# Altium PCB Group31_Racer_pli49.PcbDoc
Units mm, origin at the board's own origin, x right, y up, seen from the top; angles counter-clockwise.
Board outline 64 x 85 mm, 4 copper layers (Top Side, Ground Plane, Power Plane, Bottom Side), stack 0.844 mm thick; 87 components, 64 nets, 291 pads, 87 vias.
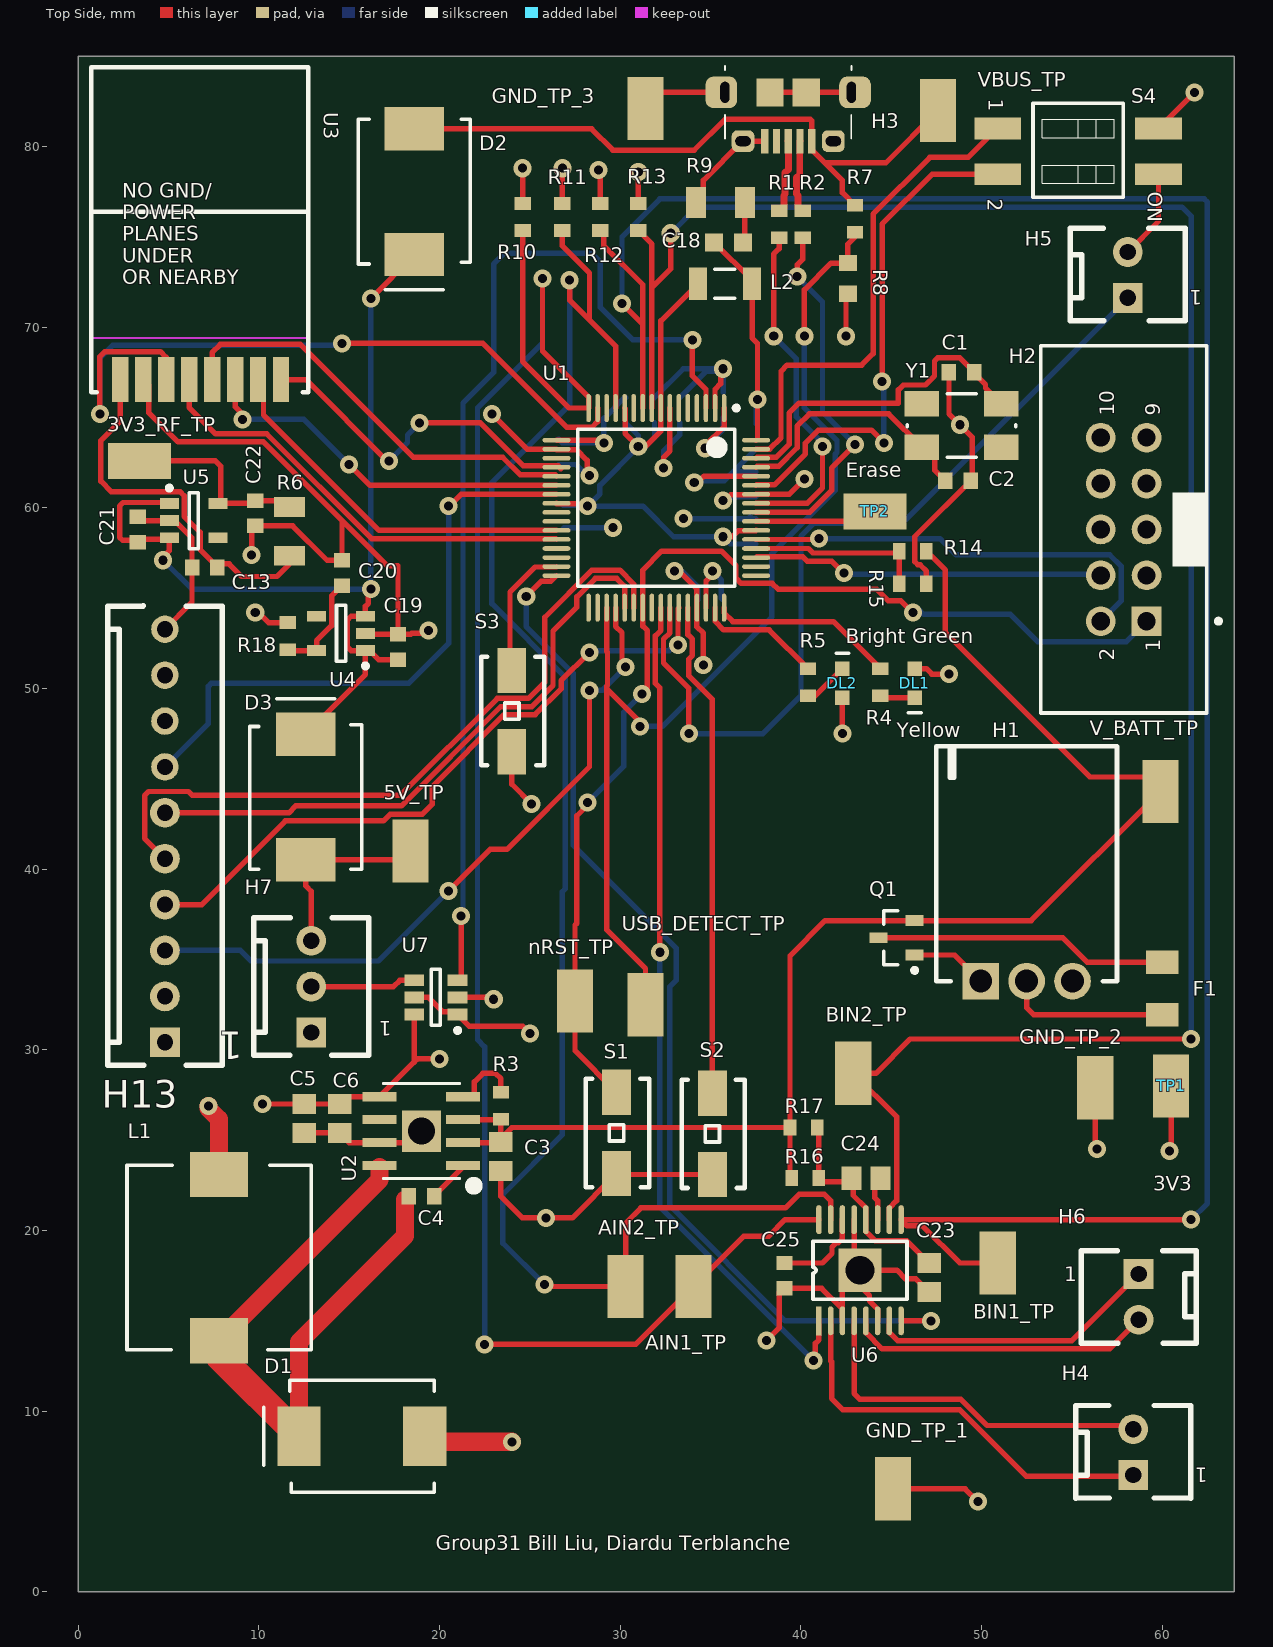
[diagram p0: Top Side view]
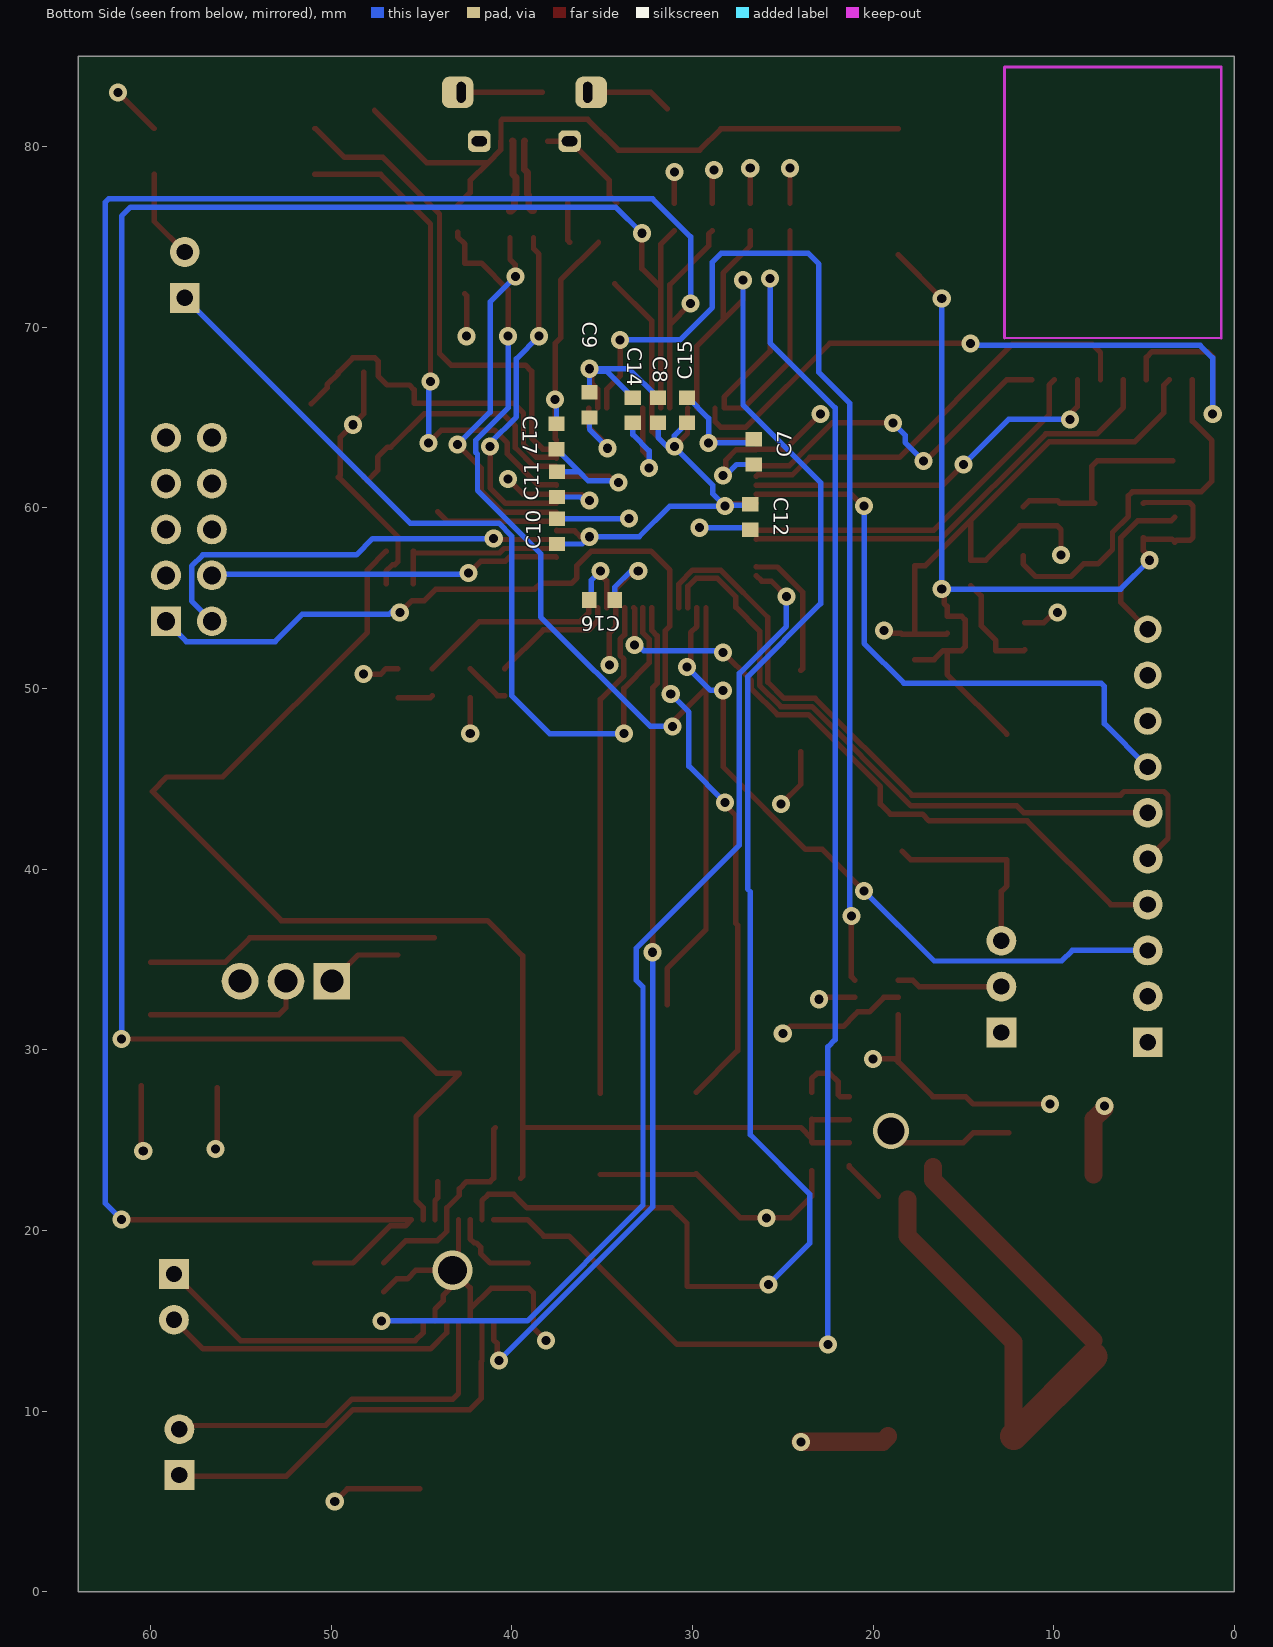
[diagram p1: Bottom Side view, seen from below]
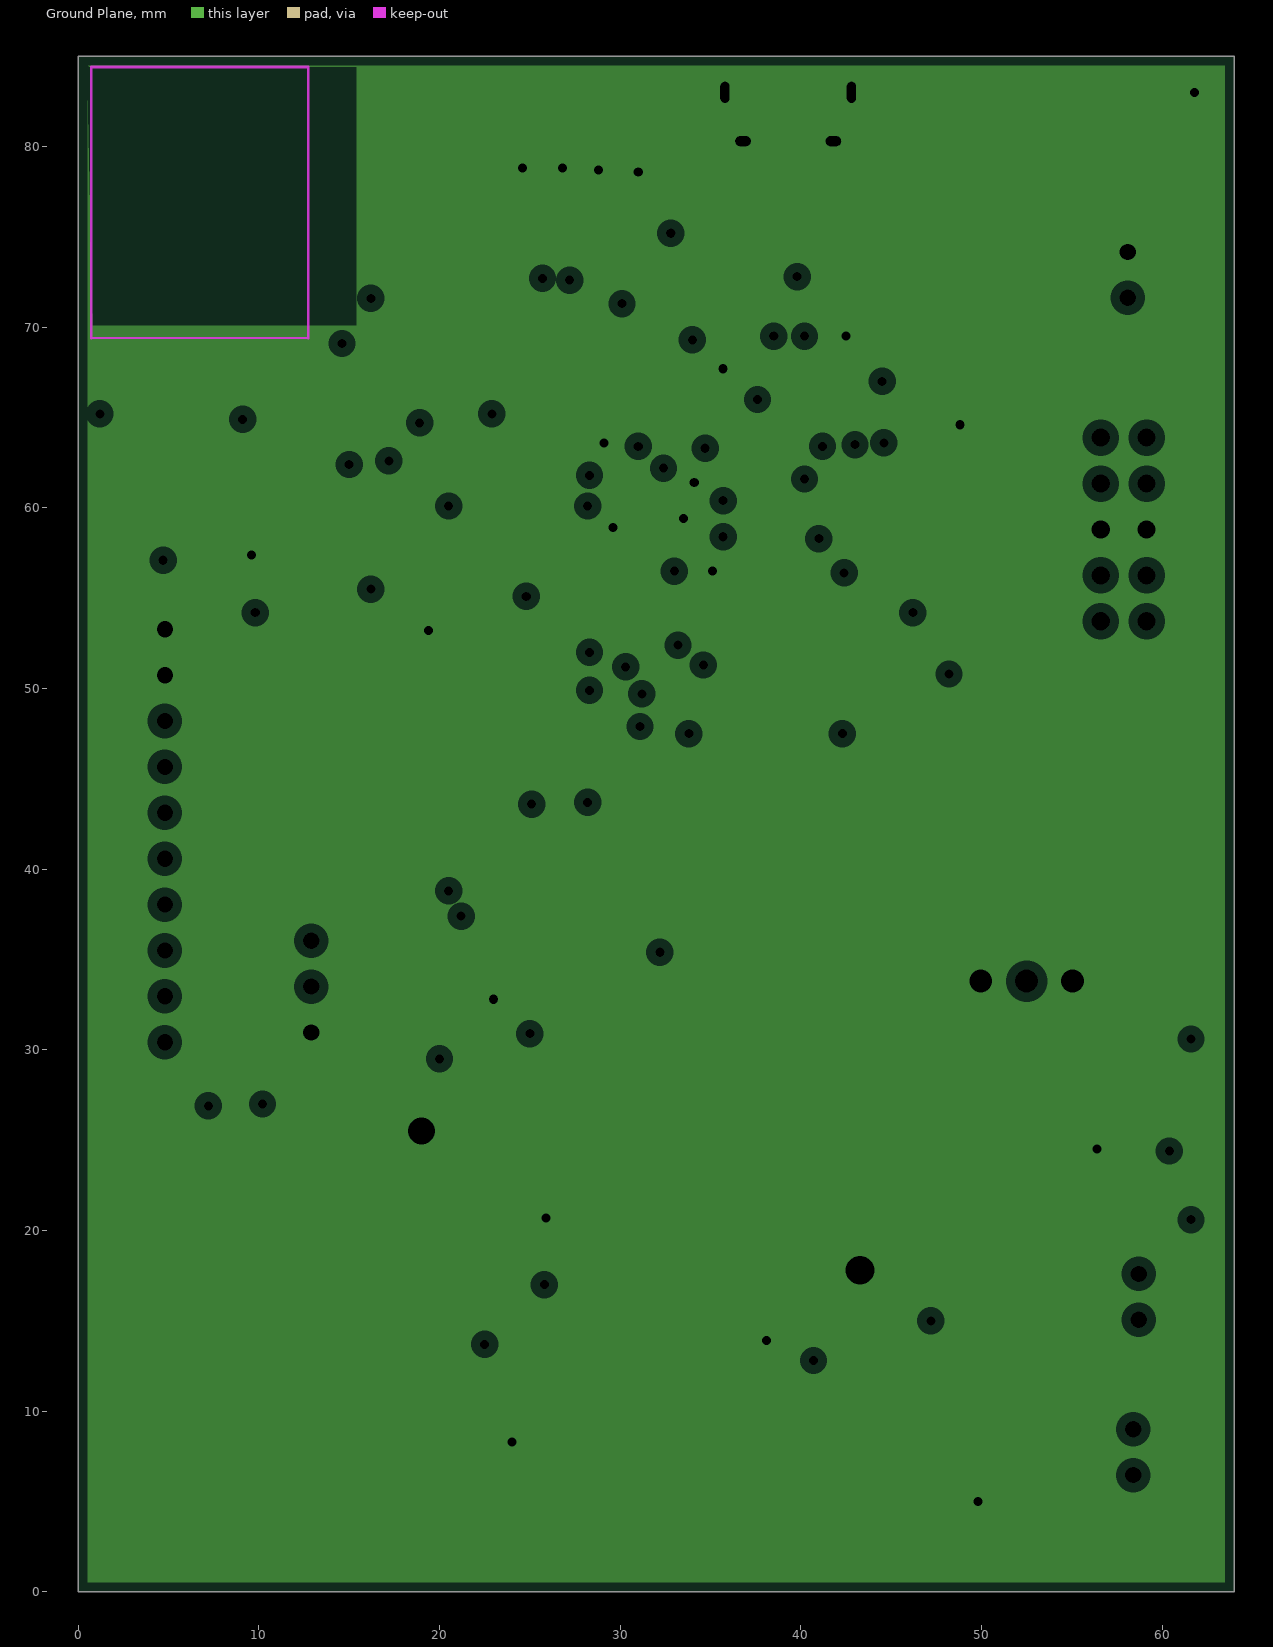
[diagram p2: Ground Plane, clearances drawn from the general rule]
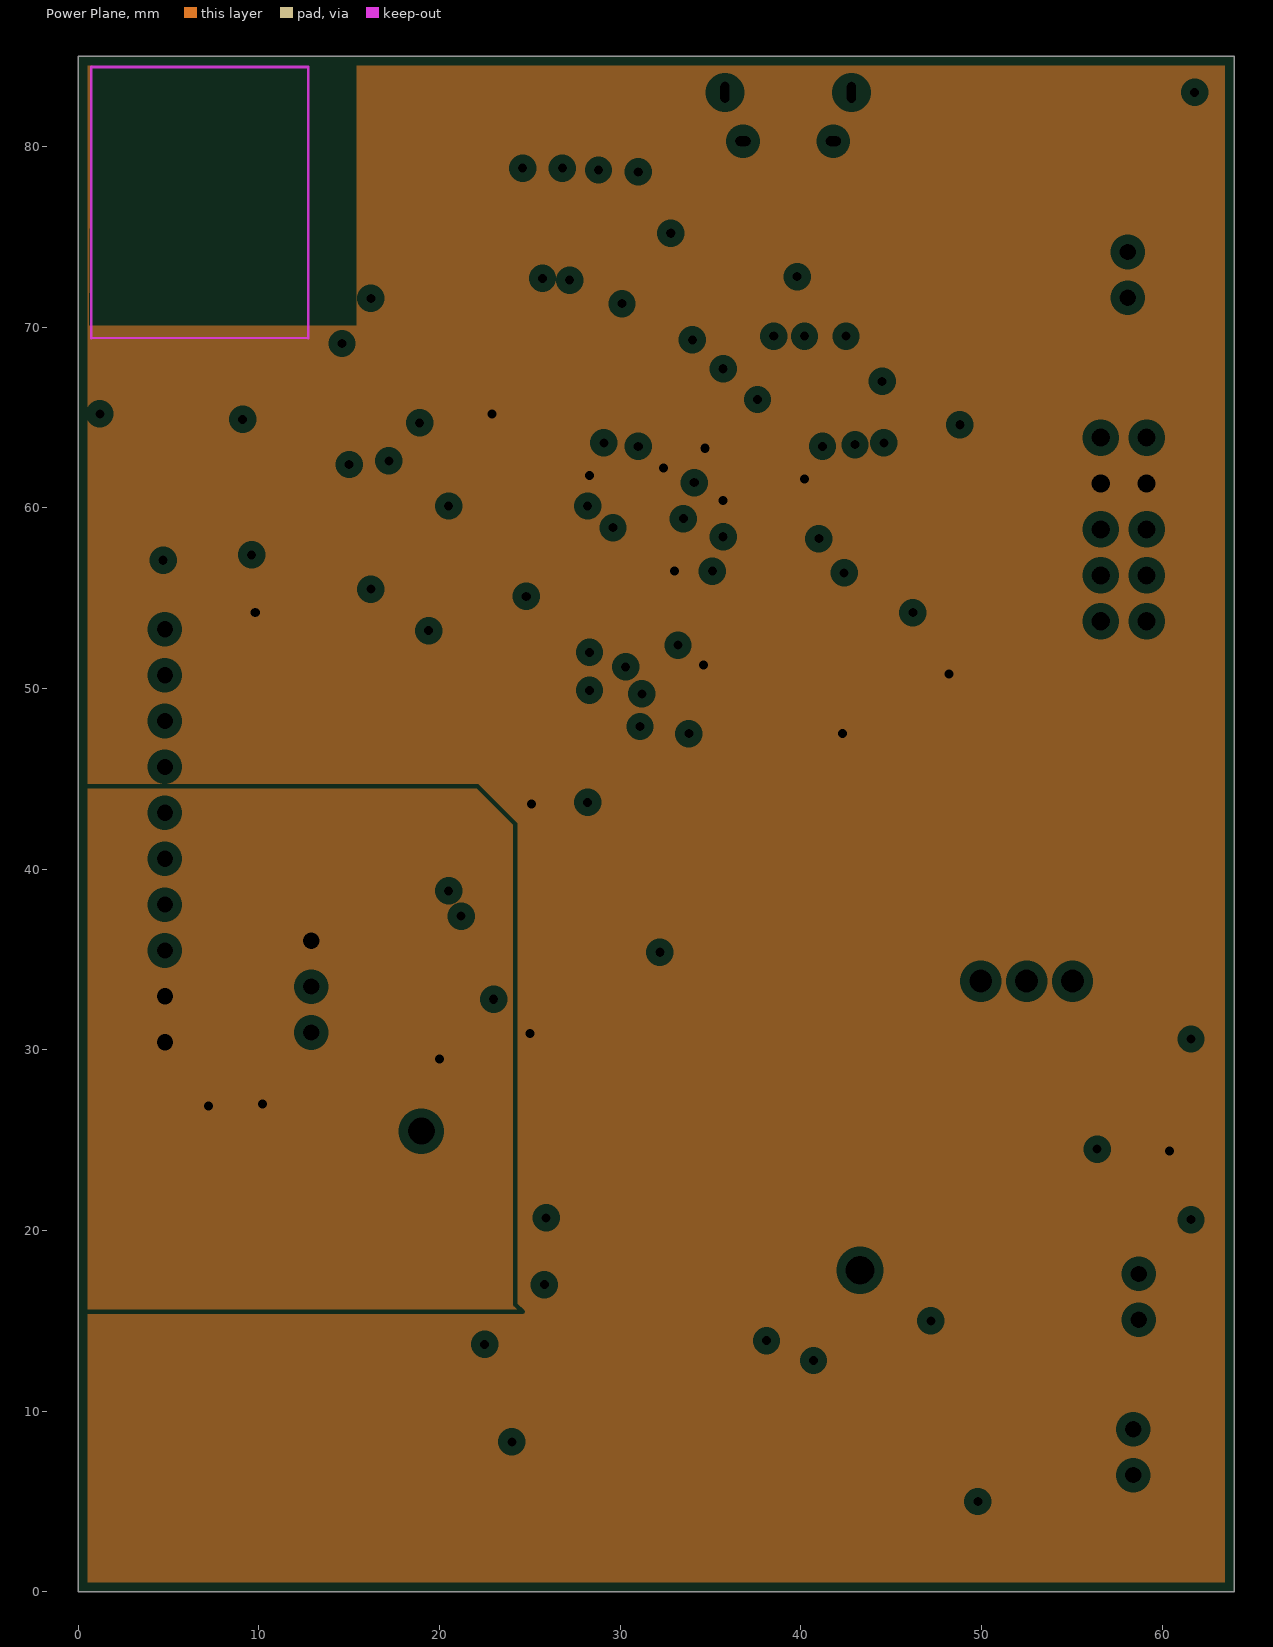
[diagram p3: Power Plane, clearances drawn from the general rule]

## Layer stack, top to bottom
Top Solder: solder mask 0.0102, Solder Resist, Dk 3.5
Top Side: signal copper 0.0356
Dielectric 1: core 0.32, FR-4, Dk 4.8
Ground Plane: plane copper 0.036, net GND
Dielectric 3: prepreg 0.127, Dk 4.2
Power Plane: plane copper 0.036, net (Multiple Nets)
Dielectric 4: core 0.254, Dk 4.2
Bottom Side: signal copper 0.0356
Bottom Solder: solder mask 0.0102, Solder Resist, Dk 3.5

## Board outline
0,85 64,85 64,0 0,0 0,85

## Design rules (kind name [scope] priority, off if disabled: settings)
BoardOutlineClearance [All] p1: gap=0.5 ignorepadtopadclearanceinfootprint=FALSE
Clearance Min_Clearance_Circuit_Labs [All] p1: gap=0.15 ignorepadtopadclearanceinfootprint=FALSE except(0: Arc-Hole Track-Hole SMDPad-Hole THPad-Hole Via-Hole Fill-Hole Poly-Hole Region-Hole Text-Hole)
DiffPairsRouting [All] p1: maxlimit=0.254 minlimit=0.254 mostfreqgap=0.254 toplayer_minwidth=0.381 toplayer_maxwidth=0.381 toplayer_prefwidth=0.381 bottomlayer_minwidth=0.381 bottomlayer_maxwidth=0.381 bottomlayer_prefwidth=0.381 maxuncoupledlength=12.7
FanoutControl Fanout_BGA [IsBGA] p1 off: bgadir=Out bgaviamode=Centered fanoutstyle=Auto fanoutdirection=Alternating viagrid=0.025 // Fanout_BGA (Default Rule)
HoleSize [All] p1: absolutevalues=TRUE maxlimit=10 minlimit=0.3 maxpercent=80.000 minpercent=20.000
MinimumAnnularRing [All] p1: minimumring=0.1
MinimumSolderMaskSliver [All] p1: minsoldermaskwidth=0.1
NetAntennae [All] p1: netantennaetolerance=1
PasteMaskExpansion [All] p1 off: expansion=0.2
PlaneClearance [All] p1: clearance=0.508
PlaneConnect [All] p1: planeconnectstyle=Relief reliefexpansion=0.508 reliefentries=4 reliefconductorwidth=0.254 reliefairgap=0.254
PolygonConnect [All] p1: connectstyle=Relief reliefconductorwidth=0.254 reliefentries=4 polygonreliefangle="90 Angle" airgapwidth=0.254
RoutingVias [All] p1: holewidth=0.5 width=1 viastyle="Through Hole" minholewidth=0.3 minwidth=0.6 maxholewidth=1 maxwidth=2
SMDNeckDown [All] p1 off: percent=50.000
SMDToCorner [All] p1: distance=98425
SMDToPlane [All] p1: distance=1968504
SilkToSolderMaskClearance SilkscreenOverComponentPads [IsPad] p1: minsilkscreentomaskgap=0.254 clearancetoexposedcopper=TRUE
SolderMaskExpansion [All] p1: expansion=0.102
ViasUnderSMD [All] p1: allowed=FALSE
Width [All] p1: maxlimit=2 minlimit=0.15 preferedwidth=0.3
21 further rules are at their usual default settings.

## Classes and differential pairs
differential pair D: +D_P -D_N

## Components (designator, comment, footprint, x,y, rotation, side; value= is the part's Value field where it differs from the comment)
3V3_RF_TP "TP" TP_1206 3.4,62.6 r180 top
5V_TP "TP" TP_1206 18.4,41 r90 top
AIN1_TP "TP" TP_1206 34.054,16.9 r270 top
AIN2_TP "TP" TP_1206 30.3,16.9 r90 top
BIN1_TP "TP" TP_1206 50.9,18.2 r90 top
BIN2_TP "TP" TP_1206 42.9,28.7 r90 top
C1 "27pF" CAPC1608L 48.9,67.5 r0 top
C2 "27pF" CAPC1608L 48.7,61.5 r180 top
C3 "10uF" CAPC2012L 23.4,24.1 r90 top
C4 "100nF" CAPC1608L 19,21.9 r180 top
C5 "33uF" CAPC2012L 12.5,26.2 r90 top
C6 "33uF" CAPC2012L 14.467,26.2 r90 top
C7 "100nF" CAPC1608L 26.6,63.1 r270 bottom
C8 "100nF" CAPC1608L 31.9,65.4 r90 bottom
C9 "100nF" CAPC1608L 35.7,65.7 r270 bottom
C10 "100nF" CAPC1608L 37.5,58.7 r90 bottom
C11 "100nF" CAPC1608L 37.5,61.3 r270 bottom
C12 "100nF" CAPC1608L 26.8,59.5 r270 bottom
C13 "10uF" CAPC1608L 7,56.7 r0 top
C14 "100nF" CAPC1608L 33.3,65.4 r270 bottom
C15 "100nF" CAPC1608L 30.3,65.4 r90 bottom
C16 "100nF" CAPC1608L 35,54.9 r180 bottom
C17 "100nF" CAPC1608L 37.525,63.95 r90 bottom
C18 "4.7uF" CAPC1608N 36,74.7 r180 top
C19 "1uF" CAPC1608L 17.7,52.3 r270 top
C20 "1uF" CAPC1608L 14.6,56.4 r270 top
C21 "1uF" CAPC1608L 3.292,58.796 r270 top
C22 "1uF" CAPC1608L 9.8,59.7 r90 top
C23 "10uF" CAPC2012L 47.1,17.4 r270 top
C24 "10uF" CAPC2012L 43.6,22.9 r0 top
C25 "2.2uF" CAPC1608L 39.1,17.5 r270 top
D1 "VS-30BQ015-M3/9AT" SMC 15.7,8.6 r180 top
D2 "VS-30BQ015-M3/9AT" SMC 18.6,77.5 r270 top
D3 "VS-30BQ015-M3/9AT" SMC 12.6,44 r90 top
DL1 "Yellow" WL-SMCW0603 46.3,49.5 r90 top
DL2 "Bright Green" WL-SMCW0603 42.3,51.1 r270 top
F1 "5A" RESC3216N 60,33.4 r90 top
GND_TP_1 "TP" TP_1206 45.1,5.7 r90 top
GND_TP_2 "TP" TP_1206 56.3,27.9 r90 top
GND_TP_3 "TP" TP_1206 31.4,82.1 r90 top
H1 "Battery_HEADER_3pin" BATT_HEADER_3POS 52.5,33.8 r0 top
H2 "Header 5X2 Vert" IDC2.54-V10D 57.87,58.804 r90 top
H3 "JS_USB_MICRO_B" FCI_USB_10118194-0001LF 39.3,84.45 r180 top
H4 "2 Pin Molex KK HDR" MOLEX_KK_2_HDR 58.4,6.46 r90 top
H5 "2 Pin Molex KK HDR" MOLEX_KK_2_HDR 58.1,71.624 r90 top
H6 "2 Pin Molex KK HDR" MOLEX_KK_2_HDR 58.7,17.597 r270 top
H7 "3 Pin Molex KK Hdr" MOLEX_KK_3_HDR 12.9,30.96 r90 top
H13 "=Value" MOLEX_KK_10_HDR 4.8,30.42 r90 top
L1 "IND 5.2UH 6A" INDUCTOR5u2 7.8,18.5 r90 top
L2 "1A max, Idc 0.3R," INDC3216L 35.8,72.4 r180 top
nRST_TP "TP" TP_1206 27.5,32.7 r90 top
Q1 "SSM3J328R,LF" SOT23_L 45.3,36.2 r180 top
R1 "27R" RESC1608L 38.8,75.7 r270 top
R2 "27R" RESC1608L 40.1,75.7 r270 top
R3 "100K" RESC1608L 23.4,26.9 r270 top
R4 "3K3" RESC1608L 44.4,50.35 r90 top
R5 "3K3" RESC1608L 40.4,50.35 r90 top
R6 "1R" RESC3216L 11.7,58.7 r270 top
R7 "27K" RESC1608L 43,76 r90 top
R8 "47K" RESC1608N 42.6,72.7 r90 top
R9 "1R" RESC3216L 35.55,76.9 r0 top
R10 "10K" RESC1608L 24.6,76.1 r270 top
R11 "10K" RESC1608L 26.8,76.1 r270 top
R12 "10K" RESC1608L 28.9,76.1 r270 top
R13 "10K" RESC1608L 31,76.1 r270 top
R14 "10K" RESC1608L 46.2,57.6 r0 top
R15 "5K6" RESC1608L 46.2,55.8 r180 top
R16 "0R" RESC1608L 40.25,22.9 r180 top
R17 "0R" RESC1608L 40.15,25.7 r180 top
R18 "0R" RESC1608L 11.6,52.9 r90 top
S1 "EVQPNF05M" EVQPNF05M 29.8,25.4 r270 top
S2 "EVQPNF05M" EVQPNF05M 35.1,25.35 r270 top
S3 "EVQPNF05M" EVQPNF05M 24,48.75 r270 top
S4 "WS_SW DIP-2" DIP_SW_2WAY_SMD 50.9,81 r270 top
TP1 "3V3" TP_1206 60.5,28 r270 top value=TP
TP2 "Erase" TP_1206 44.1,59.8 r180 top value=TP
U1 "ATSAM4S8BA-ANR" LQFP64_L 32,60 r270 top locked
U2 "ADP2302ARDZ-5.0 BUCK" RD_8_1 19,25.5 r180 top locked value=Value
U3 "nRF24 SMD" NRF24 0.729,66.4 r0 top
U4 "CAT6219-330TDGT3" SOT95P280X145-5N 14.55,53.05 r180 top
U5 "CAT6219-330TDGT3" SOT95P280X145-5N 6.392,59.296 r0 top
U6 "DRV8833" HTSOP16 41,15 r90 top locked
U7 "SN74LVC1T45" SOT23-6_N 19.8,32.9 r180 top
USB_DETECT_TP "TP" TP_1206 31.4,32.5 r90 top
V_BATT_TP "TP" TP_1206 59.9,44.3 r90 top
VBUS_TP "TP" TP_1206 47.6,82 r90 top
Y1 "12MHz" 6.0X3.5-4 48.9,64.556 r180 top

## Footprints (in the part's own frame and the unit in brackets; to place one, negate y for a bottom-side part, rotate by r counter-clockwise, add the part's x,y. Pads: shape width x height; smd on the part's side, far side on the other; paste and mask are expansions set on the pad)
6.0X3.5-4 [mm] "4 SMD 6.0X3.5 mm No Lead Crystal"
  rect 1.9x1.4 smd: 1(-2.2,-1.2) 2(2.2,-1.2) 3(2.2,1.2) 4(-2.2,1.2)
  silkscreen extent -3,-1.75 3,1.75, body extent -3,-1.75 3,1.75, height 1.2
BATT_HEADER_3POS [mil]
  rect 80x80 hole 50: 1(-100,0)
  round 80 hole 50: 2(0,0) 3(100,0)
  silkscreen extent -197,0 197,512
CAPC1608L [mm] "Chip Capacitor, Body 1.6x0.8mm, IPC High Density"
  rect 0.8x0.9 smd: 1(-0.7,0) 2(0.7,0)
  body extent -0.87,-0.48 0.87,0.48, height 0.85
CAPC1608N [mm] "Chip Capacitor, Body 1.6x0.8mm, IPC Medium Density"
  rect 1x1 smd: 1(-0.8,0) 2(0.8,0)
  body extent -0.87,-0.48 0.87,0.48, height 0.85
CAPC2012L [mm] "Chip Capacitor, Body 2.0x1.3mm, IPC High Density"
  rect 1.1x1.3 smd: 1(-0.8,0) 2(0.8,0)
  body extent -1.1,-0.72 1.1,0.72, height 1.1
DIP_SW_2WAY_SMD [mm] "DIP Switch; 4 Leads"
  rect 1.2x2.6 smd: 1(0,0) 2(2.54,0) 3(2.54,8.9) 4(0,8.9)
  silkscreen extent -1.4,1.95 3.81,6.95
EVQPNF05M [mm] "Panansonic light touch SMD push button switch"
  rect 2.5x1.6 smd: 1(-2.25,0) 2(2.25,0)
  silkscreen extent -3,-1.7 3,1.8, body extent -3,-1.7 3,1.8, height 5
FCI_USB_10118194-0001LF [mm] "Micro USB B Type Receptacle"
  rect 0.4x1.35 smd mask+0.07: 1(-1.3,4.15) 2(-0.65,4.15) 3(0,4.15) 4(0.65,4.15) 5(1.3,4.15)
  rrect50% 1.75x1.75 hole 0.5 slot 1.15 at 90 deg copper offset -0.2,0 paste+0 mask+0.1: 6(-3.5,1.45)
  rrect50% 1.25x1.2 hole 0.55 slot 0.85 at 0 deg: 6(-2.5,4.15) 6(2.5,4.15)
  rect 1.5x1.55 smd: 6(-1,1.45) 6(1,1.45)
  rrect50% 1.75x1.75 hole 0.5 slot 1.15 at 90 deg copper offset 0.2,0 paste+0 mask+0.1: 6(3.5,1.45)
  silkscreen extent -3.5,0 3.5,4
HTSOP16 [mm]
  rect 1.6x0.3 smd: 1(0,0)
  oval 1.6x0.3 smd: 2(0,-0.65) 3(0,-1.3) 4(0,-1.95) 5(0,-2.6) 6(0,-3.25) 7(0,-3.9) 8(0,-4.55) 9(5.6,-4.55) 10(5.6,-3.9) 11(5.6,-3.25) 12(5.6,-2.6) 13(5.6,-1.95) 14(5.6,-1.3) 15(5.6,-0.65) 16(5.6,0)
  rect 2.4x2.4 smd paste-0.5: 17(2.8,-2.275)
  silkscreen extent 1.2,-4.88 4.4,0.33
IDC2.54-V10D [mm] "Connector; IDC, Low Profile Male Header, Thru-Hole; 10 Position; Vertical; Pitch 2.54 mm; Body 20.32 x 9.2 x 9.45 mm (LxWxH)"
  rect 1.65x1.65 hole 1: 1(-5.08,-1.27)
  round 1.65 hole 1: 2(-5.08,1.27) 3(-2.54,-1.27) 4(-2.54,1.27) 5(0,-1.27) 6(0,1.27) 7(2.54,-1.27) 8(2.54,1.27) 9(5.08,-1.27) 10(5.08,1.27)
  silkscreen extent -10.16,-5.38 10.16,4.6, body extent -10.16,-4.6 10.16,4.6, height 9.45
INDC3216L [mm] "Chip Inductor, Body 3.2x1.6mm, IPC High Density"
  rect 1x1.8 smd: 1(-1.5,0) 2(1.5,0)
  silkscreen extent -0.55,-0.8 0.55,0.8, body extent -1.75,-0.95 1.75,0.95, height 1.9
INDUCTOR5u2 [mm]
  rect 2.5x3.2 smd: 1(-4.6,0) 2(4.6,0)
  silkscreen extent -5.1,-5.1 5.1,5.1
LQFP64_L [mm] "Thin QFP, 64-Leads, Body 10x10mm, Pitch 0.5mm, IPC High Density"
  oval 1.55x0.25 smd mask+0.07: 1(-5.525,3.75) 2(-5.525,3.25) 3(-5.525,2.75) 4(-5.525,2.25) 5(-5.525,1.75) 6(-5.525,1.25) 7(-5.525,0.75) 8(-5.525,0.25) 9(-5.525,-0.25) 10(-5.525,-0.75) 11(-5.525,-1.25) 12(-5.525,-1.75) 13(-5.525,-2.25) 14(-5.525,-2.75) 15(-5.525,-3.25) 16(-5.525,-3.75) 33(5.525,-3.75) 34(5.525,-3.25) 35(5.525,-2.75) 36(5.525,-2.25) 37(5.525,-1.75) 38(5.525,-1.25) 39(5.525,-0.75) 40(5.525,-0.25) 41(5.525,0.25) 42(5.525,0.75) 43(5.525,1.25) 44(5.525,1.75) 45(5.525,2.25) 46(5.525,2.75) 47(5.525,3.25) 48(5.525,3.75)
  oval 0.25x1.55 smd mask+0.07: 17(-3.75,-5.525) 18(-3.25,-5.525) 19(-2.75,-5.525) 20(-2.25,-5.525) 21(-1.75,-5.525) 22(-1.25,-5.525) 23(-0.75,-5.525) 24(-0.25,-5.525) 25(0.25,-5.525) 26(0.75,-5.525) 27(1.25,-5.525) 28(1.75,-5.525) 29(2.25,-5.525) 30(2.75,-5.525) 31(3.25,-5.525) 32(3.75,-5.525) 49(3.75,5.525) 50(3.25,5.525) 51(2.75,5.525) 52(2.25,5.525) 53(1.75,5.525) 54(1.25,5.525) 55(0.75,5.525) 56(0.25,5.525) 57(-0.25,5.525) 58(-0.75,5.525) 59(-1.25,5.525) 60(-1.75,5.525) 61(-2.25,5.525) 62(-2.75,5.525) 63(-3.25,5.525) 64(-3.75,5.525)
  silkscreen extent -5.65,-4.35 4.35,4.55, body extent -5,-5 5,5, height 1.6
MOLEX_KK_2_HDR [mil] "MOLEX_KK_2_HDR"
  rect 65x65 hole 35.43: 1(0,0)
  round 65 hole 35.43: 2(100,0)
  silkscreen extent -50,-125 152,125, body extent -44,-121 146,119, height 630
MOLEX_KK_3_HDR [mil] "MOLEX_KK_3_HDR"
  rect 65x65 hole 35.43: 1(0,0)
  round 65 hole 35.43: 2(100,0) 3(200,0)
  silkscreen extent -50,-125 250,125, body extent -44,-120 244,119, height 630
MOLEX_KK_10_HDR [mil] "MOLEX_KK_10_HDR"
  rect 65x65 hole 35.43: 1(0,0)
  round 65 hole 35.43: 2(100,0) 3(200,0) 4(300,0) 5(400,0) 6(500,0)
  round 60 hole 35.43: 7(600,0) 8(700,0) 9(800,0) 10(900,0)
  silkscreen extent -50,-125 951,125, body extent -44,-120 944,120, height 630
NRF24 [mm]
  rect 0.9x2.5 smd: 1(1.6,0.7) 2(2.871,0.7) 3(4.143,0.7) 4(5.414,0.7) 5(6.686,0.7) 6(7.957,0.7) 7(9.229,0.7) 8(10.5,0.7)
  Keep-Out Layer lines w0.1: 0,3 12,3
  Keep-Out Layer lines w0.15: 0,3 0,18 12,18 12,3
  silkscreen extent 0,0 12,18
RD_8_1 [mil]
  rect 74x20 smd paste+0 mask+0: 1(-91,75) 2(-91,25) 3(-91,-25) 4(-91,-75) 5(91,-75) 6(91,-25) 7(91,25) 8(91,75)
  rect 84.65x90 smd paste-44.5 mask+0: EPAD(0,0)
  silkscreen extent -118,-104 84,123, body extent 0,0 10,10, height 10
RESC1608L [mm] "Chip Resistor, Body 1.6x0.8mm, IPC High Density"
  rect 0.7x0.9 smd: 1(-0.75,0) 2(0.75,0)
  body extent -0.85,-0.48 0.85,0.48, height 0.9
RESC1608N [mm] "Chip Resistor, Body 1.6x0.8mm, IPC Medium Density"
  rect 0.9x1 smd: 1(-0.85,0) 2(0.85,0)
  body extent -0.85,-0.48 0.85,0.48, height 0.6
RESC3216L [mm] "Chip Resistor, Body 3.1x1.6mm, IPC High Density"
  rect 1.1x1.7 smd: 1(-1.35,0) 2(1.35,0)
  body extent -1.68,-0.87 1.68,0.87, height 2.54
RESC3216N [mm] "Chip Resistor, Body 3.2x1.6mm, IPC Medium Density"
  rect 1.3x1.8 smd: 1(-1.45,0) 2(1.45,0)
  body extent -1.68,-0.87 1.68,0.87, height 0.71
SMC [mm] "DO-214-AB/SMC; 2 C-Bend Leads; Body 7.9 x 5.9 mm, inc. leads (LxW)"
  rect 2.4x3.3 smd: 1(-3.475,0) 2(3.475,0)
  silkscreen extent -4,-3.1 5.43,3.1
SOT23-6_N [mm]
  rect 1.1x0.65 smd: 1(-1.2,0.95) 2(-1.2,0) 3(-1.2,-0.95) 4(1.2,-0.95) 5(1.2,0) 6(1.2,0.95)
  silkscreen extent -1.33,-1.55 0.25,1.95, body extent -0.9,-1.55 0.9,1.55, height 1.45
SOT23_L [mm] "SOT23, 3-Leads, Body 2.9x1.3mm, Pitch 0.95mm, Lead Span 2.3mm, IPC High Density"
  rect 1x0.6 smd: 1(-1,0.95) 2(-1,-0.95) 3(1,0)
  silkscreen extent -1.13,-1.5 0.7,1.92, body extent -0.7,-1.5 0.7,1.5, height 1.1
SOT95P280X145-5N [mm] "SOT23, 5-Leads, Body 2.90x2.80mm, Pitch 0.95mm, IPC Medium Density"
  rect 1.05x0.6 smd: 1(-1.35,0.95) 2(-1.35,0) 3(-1.35,-0.95) 4(1.35,-0.95) 5(1.35,0.95)
  silkscreen extent -1.48,-1.55 0.25,1.92, body extent -0.87,-1.52 0.87,1.53, height 1.45
TP_1206 [mm] "Test Point Pad"
  rect 3.5x2 smd: 1(0,0)
  body extent -1.62,-0.85 1.63,0.8, height 2
WL-SMCW0603 [mm] "2.4 x 0.8 x 0.7mm LED"
  rect 0.8x0.8 smd: 1(0,0) 2(1.6,0)
  silkscreen extent -0.85,-0.35 -0.85,0.35

## Part data
3V3_RF_TP 5V_TP AIN1_TP AIN2_TP BIN1_TP BIN2_TP GND_TP_1 GND_TP_2 GND_TP_3 nRST_TP TP1 TP2 USB_DETECT_TP V_BATT_TP VBUS_TP: library part TP_1206, "Test-Point 3.3x1.6x2.1mm SMD", Manufacturer="Harwin Inc", Manufacturer Part Number=S1751-46R, Supplier Part Number 1=952-1478-2-ND, Mounting Type="Surface Mount", Storage Location=ProtoPlace, Supplier="ECE Dept", Supplier 1=Digi-Key, Supplier 2=Farnell, Supplier Part Number 2=1826282, Type="PC Test Point"
C1 C2: library part CC_27pF_0603, "CAP CER 27pF NPO/COG +-5% 50V 0603", Code_IPC="1608 [0603]", PackageReference=0603, Storage Location="PCB Assembly WS", Supplier="ECE Dept"
C3: library part CC_10uF_16V_0805, "CAP CER 10uF X5R 16V 0805", Manufacturer="Samsung Electro-Mechanics", Manufacturer Part Number=CL21A106KOQNNWE, Max Voltage=16V, Operating Temperature="-55°C ~ 85°C", Package / Case="0805 (2012 Metric)", Ratings=-, Supplier Part Number 1=1276-2894-1-ND, Temperature Coefficient=X5R, Tolerance=±10%, Applications="General Purpose", Category=Capacitors, Code_IPC=2012[0805], ComponentLink1Description=http://www.samsungsem.com/kr/support/product-search/mlcc/CL21A106KOQNNWE.jsp, ComponentLink1URL=http://www.samsungsem.com/kr/support/product-search/mlcc/CL21A106KOQNNWE.jsp, Features=-, Height - Seated (Max)=-, Lead Spacing=-, Lead Style=-, Mounting Type="Surface Mount, MLCC", Note="Footprint corresponds to dimensions for bulk cassette packaging. This case size has tightened tolerances.", Notification="Current market demand for these product types have resulted in fluctuating and extending lead times. Lead times may differ.", PackageReference=0805, Packaging="Cut Tape (CT)", Part Status=Active, Pricing 1="1=0.35, 10=0.25, 100=0.1178, 500=0.08254, 1000=0.06831 (NZD)", RoHS="RoHS Compliant", Size / Dimension="0.079\" L x 0.049\" W (2.00mm x 1.25mm)", Stock 1=20000, Supplier 1=Digi-Key, Thickness (Max)="0.055\" (1.40mm)", Voltage - Rated=16V
C4 C7 C8 C9 C10 C11 C12 C14 C15 C16 C17: library part CC_100nF_0603, "CAP CER 100nF X7R +-10% 50V 0603", Code_IPC="1608 [0603]", PackageReference=0603, Storage Location="PCB Assembly WS", Supplier="ECE Dept"
C5 C6: library part CC_33uF_6V3_0805, "CAP CER 33uF X5R 6V3 0805", Manufacturer="TDK Corporation", Manufacturer Part Number=C2012X5R0J336M125AC, Operating Temperature="-55°C ~ 85°C", Package / Case="0805 (2012 Metric)", Ratings=-, Supplier Part Number 1=445-5986-1-ND, Temperature Coefficient=X5R, Tolerance=±20%, Voltage - Rated=6.3V, Applications="General Purpose", Category=Capacitors, ComponentLink1Description=https://product.tdk.com/info/en/catalog/datasheets/mlcc_commercial_general_en.pdf, ComponentLink1URL=https://product.tdk.com/info/en/catalog/datasheets/mlcc_commercial_general_en.pdf, Failure Rate=-, Features="Low ESL", Height - Seated (Max)=-, Lead Spacing=-, Lead Style=-, Mounting Type="Surface Mount, MLCC", Notification="Current market demand for these product types have resulted in fluctuating and extending lead times. Lead times may differ.", Packaging="Cut Tape (CT)", Part Status=Active, Pricing 1="1=1.65, 10=1.262, 100=0.9023, 500=0.6985, 1000=0.60149 (NZD)", RoHS="RoHS Compliant", Size / Dimension="0.079\" L x 0.049\" W (2.00mm x 1.25mm)", Stock 1=20000, Supplier 1=Digi-Key, Thickness (Max)="0.057\" (1.45mm)"
C13: library part CC_10uF_0603, "CAP CER 10UF X5R +-20% 6V3 0603", Voltage - Rated=6.3V, Storage Location="PCB Assembly WS", Supplier="ECE Dept"
C18: library part CC_4.7uF_0603, "CAP CER 4.7uF X5R +-20%  10V 0603", Max Voltage=10V, Code_IPC=2012[0805], Note="Footprint corresponds to dimensions for bulk cassette packaging. This case size has tightened tolerances.", PackageReference=0805, Storage Location="PCB Assembly WS", Supplier="ECE Dept"
C19 C20 C21 C22: library part CC_1uF_0603, "CAP CER 1uF Y5V -20% +80% 16V 0603", Max Voltage=16V, Code_IPC="1608 [0603]", PackageReference=0603, Storage Location="PCB Assembly WS", Supplier="ECE Dept"
C23 C24: library part CC_10uF_16V_0805, "CAP CER 10uF X5R 16V 0805", Manufacturer="Samsung Electro-Mechanics", Manufacturer Part Number=CL21A106KOQNNWE, Operating Temperature="-55°C ~ 85°C", Package / Case="0805 (2012 Metric)", Ratings=-, Supplier Part Number 1=1276-2894-1-ND, Temperature Coefficient=X5R, Tolerance=±10%, Voltage - Rated=16V, Applications="General Purpose", Category=Capacitors, Code_IPC=2012[0805], ComponentLink1Description=http://www.samsungsem.com/kr/support/product-search/mlcc/CL21A106KOQNNWE.jsp, ComponentLink1URL=http://www.samsungsem.com/kr/support/product-search/mlcc/CL21A106KOQNNWE.jsp, Features=-, Height - Seated (Max)=-, Lead Spacing=-, Lead Style=-, Mounting Type="Surface Mount, MLCC", Note="Footprint corresponds to dimensions for bulk cassette packaging. This case size has tightened tolerances.", Notification="Current market demand for these product types have resulted in fluctuating and extending lead times. Lead times may differ.", PackageReference=0805, Packaging="Cut Tape (CT)", Part Status=Active, Pricing 1="1=0.35, 10=0.25, 100=0.1178, 500=0.08254, 1000=0.06831 (NZD)", RoHS="RoHS Compliant", Size / Dimension="0.079\" L x 0.049\" W (2.00mm x 1.25mm)", Stock 1=20000, Supplier 1=Digi-Key, Thickness (Max)="0.055\" (1.40mm)"
C25: library part CC_2.2uF_0603, "CAP CER 2.2uF X5R +-20% 10V 0603", Max Voltage=10V, Code_IPC="1608 [0603]", PackageReference=0603, Storage Location="PCB Assembly WS", Supplier="ECE Dept"
D1 D2 D3: library part DS_VS-30BQ015-M3, "DIODE, SCHOTTKY, 3A, 15V, DO-214AB / SMC", Average Rectified Current=3A, Forward Voltage=350mV, Manufacturer="Vishay Semiconductors", Max Forward Surge Current (Ifsm)=650A, Max Reverse Voltage (DC)=15V, Peak Reverse Current=4mA, Supplier Part Number=VS-30BQ015-M3/9AT-ND, Supplier Part Number 1=VS-30BQ015-M3/9ATGIDKR-ND, ComponentLink1Description=https://datasheet.ciiva.com/36181/vs-30bq015-m3-9at-36181258.pdf, ComponentLink1URL=https://datasheet.ciiva.com/36181/vs-30bq015-m3-9at-36181258.pdf, Manufacturer Part Number=VS-30BQ015-M3/9AT, Supplier=Digi-Key, Supplier 1=Digi-Key, Supplier 2=Element14, Supplier Part Number 2=2628288
DL1: library part DL_150060YS75000, "LED Yellow 120mcd 0603 SMD", Forward Current If=30, Forward Voltage=2, Manufacturer="WURTH ELEKTRONIK", Manufacturer Part Number=150060YS75000, Supplier Part Number 1=2322074, LED Colour=Yellow, LED Mounting=SMD, Lens Shape=Rectangular, Luminous Intensity=120, Storage Location="PCB Assembly WS", Supplier="ECE Dept", Supplier 1=Farnell, Viewing Angle=140°, Wavelength Typ=590
DL2: library part DL_150060VS75000, "LED Bright Green 40mcd 0603 SMD", Forward Current If=30, Forward Voltage=2, Manufacturer="WURTH ELEKTRONIK", Manufacturer Part Number=150060VS75000, Supplier Part Number 1=2322073, LED Colour="Bright Green", LED Mounting=SMD, Luminous Intensity=40, Storage Location="PCB Assembly WS", Supplier="ECE Dept", Supplier 1=Farnell, Viewing Angle=140°, Wavelength Typ=570
F1: library part FS_Fuse_5.0A, "Fuse 5.0A Fast Acting 1206 SMD", Case/Package=1206, Case Code (Metric)=3216, DC Cold Resistance=19mR, Manufacturer="Bel TRP", Manufacturer Part Number=C1F5, Max Operating Temperature=125°C, Min Operating Temperature=-55°C, Supplier Part Number 1=507-1886-1-ND, Voltage Rating=125V, Voltage Rating (DC)=63V, Approvals=CE,cURus, Case Code (Imperial)=1206, ComponentLink1Description=http://www.farnell.com/datasheets/2571625.pdf, ComponentLink1URL=http://www.farnell.com/datasheets/2571625.pdf, ComponentLink2Description=http://belfuse.com/pdfs/C1F.pdf, ComponentLink2URL=http://belfuse.com/pdfs/C1F.pdf, ComponentLink3Description=http://www.mouser.com/ds/2/643/C1F-594910.pdf, ComponentLink3URL=http://www.mouser.com/ds/2/643/C1F-594910.pdf, ComponentLink4Description=https://belfuse.com/resources/StewartConnector/C1F.pdf, ComponentLink4URL=https://belfuse.com/resources/StewartConnector/C1F.pdf, Contact Plating=Nickel,Tin, Current Rating=5A, Fuse Type="Board Mount (Cartridge Style Excluded)", Length=0.126inch, Mount="Surface Mount", Number of Pins=2, Packaging="Tape and Reel", Pricing 1="1=0.32, 5=0.312, 10=0.298, 50=0.2662, 100=0.2479, 250=0.22032, 500=0.1836, 1000=0.17442 (USD)", Stock 1=725, Supplier 1=Digi-Key, Supplier 2=Element14, Supplier Part Number 2=2848595, Voltage Rating (AC)=125V, Width=0.062inch
H1: "3Pin Header 2.54mm spacing"
H2: library part JA_HDR_IDC_5X2_VERT, "IDC Header, 2,54mm, 10-Pin, Vert", Supplier Part Number 1=1096985, Storage Location="ECE Dept Store", Supplier="ECE Dept", Supplier 1=Farnell
H3: library part JS_USB_MICRO_B_SMT, "CONN USB MICRO B RECPT SMT R/A", Manufacturer=FCI, Manufacturer Part Number=10118194-0001LF, Supplier Part Number 1=609-4618-1-ND, Features="Shielded, Solder Retention", Gender=Receptacle, Mounting Type="Surface Mount, Right Angle, Horizontal", Number of Contacts=5, Specifications="USB 2.0", Supplier 1=Digi-Key
H4 H5 H6: library part JA_MOLEX_KK_2POS, "CONN HEADER 2POS 2.54mm VERT_Thru Hole", Supplier Part Number 1=1462926, Storage Location="ECE Dept Store", Supplier="ECE Dept", Supplier 1=Farnell
H7: library part JA_MOLEX_KK_3POS, "CONN HEADER 3POS 2.54mm VERT_Thru Hole", Manufacturer=Molex, Manufacturer PN=22-23-2031, Supplier Part Number 1=9731156, Storage Location="ECE Dept Store", Supplier="ECE Dept", Supplier 1=Farnell
H13: library part JA_MOLEX_KK_10POS, "CONN HEADER 10POS 2.54mm VERT_ Thru Hole", Supplier Part Number 1=1756828, Storage Location="ECE Dept Store", Supplier="ECE Dept", Supplier 1=Farnell
L1: library part CDRH104RNP-5R2NC, "FIXED IND 5.2UH 6A 22 MOHM SMD", Current - Saturation=5.6A, DC Resistance (DCR)="22 mOhm Max", Frequency - Self Resonant=-, Manufacturer="Sumida America Components Inc.", Operating Temperature="-40°C ~ 100°C", Package / Case=Nonstandard, Supplier Part Number 1=308-2280-1-ND, Tolerance=±30%, Category="Inductors, Coils, Chokes", ComponentLink1Description=http://products.sumida.com/products/pdf/CDRH104R.pdf, ComponentLink1URL=http://products.sumida.com/products/pdf/CDRH104R.pdf, Height - Seated (Max)="0.157\" (4.00mm)", Manufacturer Part Number=CDRH104RNP-5R2NC, Material - Core=Ferrite, Mounting Type="Surface Mount", Packaging="Cut Tape (CT)", Part Status=Active, Pricing 1="1=2.9, 10=2.678, 100=1.8743, 500=1.5173 (NZD)", Q @ Freq=-, Ratings=-, RoHS="RoHS Compliant", Shielding=Shielded, Size / Dimension="0.402\" L x 0.394\" W (10.20mm x 10.00mm)", Stock 1=3849, Supplier 1=Digi-Key, Supplier Device Package=-, Type=-
L2: library part IN_Ferrite-Bead, "Ferrite Bead, Rdc 0.3R, Z100MHZ 600R, Imax 1A, SMD 1206", DC Current Rating=1, DC Resistance Max=0.08, Ferrite Case Style="1206 ^3216 Metric]", Frequency Range="50MHz to 1", Impedance Tolerance="± 25%", Manufacturer=FAIR-RITE, Manufacturer Part Number=2512066017Y1, Supplier Part Number 1=1612060, Ferrite Mounting=SMD, Impedance=600, Manufacturer PN=2512066017Y1, Storage Location="PCB Assembly WS", Supplier="ECE Dept", Supplier 1=Farnell
Q1: library part TM_SSM3J328R, "MOSFET P-CH 20V 6A SOT23-3", Case/Package=SOT-23-3, Continuous Drain Current (ID)=6A, Drain to Source Breakdown Voltage=-20V, Drain to Source Resistance=47.4mR, Drain to Source Voltage (Vdss)=20V, Gate to Source Voltage (Vgs)=8V, Input Capacitance=840pF, Input Capacitance (Ciss) @ Vds="840pF @ 10V", Manufacturer=Toshiba, Max Operating Temperature=150°C, Max Power Dissipation=1W, Min Operating Temperature=-55°C, Package / Case="SOT-23-3 Flat Leads", Package Quantity=3000, Power Dissipation=2W, Supplier Device Package=SOT-23F, Supplier Part Number=SSM3J328RLFDKR-ND, ComponentLink1Description=https://datasheet.ciiva.com/11158/ssm3j328r-datasheet-en-20140301-11158652.pdf, ComponentLink1URL=https://datasheet.ciiva.com/11158/ssm3j328r-datasheet-en-20140301-11158652.pdf, Current - Continuous Drain (Id) @ 25° C=6A, Element Configuration=Single, FET Feature="Logic Level Gate, 1.5V Drive", FET Type="MOSFET P-Channel, Metal Oxide", Gate Charge (Qg) @ Vgs="12.8nC @ 4.5V", Manufacturer Part Number=SSM3J328R,LF, Mount="Surface Mount", Number of Channels=1, Number of Elements=1, Number of Pins=3, Packaging="Tape and Reel", Power - Max=1W, Pricing="1=0.79, 10=0.658, 25=0.5772, 100=0.4939, 250=0.42836, 500=0.36284, 1000=0.27972 (NZD)", Radiation Hardening=No, Rds On Max=29.8mR, Storage Location="PCB Assembly WS", Supplier=Digi-Key, Supplier 1=Digi-Key, Supplier Part Number 1=SSM3J328RLFDKR-ND, Turn-Off Delay Time=107ns, Turn-On Delay Time=32ns, Vgs(th) (Max) @ Id="1V @ 1mA"
R1 R2: library part RS_27R, "RES 27 OHM 1/10W 5% 0603 SMD", Storage Location="PCB Assembly WS", Supplier="ECE Dept"
R3: library part RS_100K, "RES 100K OHM 1/10W 5% 0603 SMD", Storage Location="PCB Assembly WS", Supplier="ECE Dept"
R4 R5: library part RS_3K3, "RES 3.3K OHM 1/10W 5% 0603 SMD", Storage Location="PCB Assembly WS", Supplier="ECE Dept"
R6 R9: library part RT_1R, "RES 1R OHM 1/4W 5% 1206 SMD", Storage Location="PCB Assembly WS", Supplier="ECE Dept"
R7: library part RS_27K, "RES 27K OHM 1/10W 5% 0603 SMD", Storage Location="PCB Assembly WS", Supplier="ECE Dept"
R8: library part RS_47K, "RES 47.0K OHM 1/10W 5% 0603 SMD", Storage Location="PCB Assembly WS", Supplier="ECE Dept"
R10 R11 R12 R13 R14: library part RS_10K, "RES 10.0K OHM 1/10W 5% 0603 SMD", Storage Location="PCB Assembly WS", Supplier="ECE Dept"
R15: library part RS_5K6, "RES 5.6K OHM 1/10W 5% 0603 SMD", Storage Location="PCB Assembly WS", Supplier="ECE Dept"
R16 R17 R18: library part RS_0R0, "RES 0.0 OHM 1/10W 5% 0603 SMD", Storage Location="PCB Assembly WS", Supplier="ECE Dept"
S1 S2 S3: library part WS_EVQPNF05M, "Panasonic 6 x 3.5mm SMD Light Touch Switch Type SMD", Manufacturer=Panasonic, Supplier Part Number 1=2079481, Manufacturer PN=EVQPNF05M, PackageDescription="6.0 x 3.5 mm", Storage Location="PCB Assembly WS", Supplier="ECE Dept", Supplier 1=Farnell, Supplier 2=Digi-Key, Supplier Part Number 2=P13598SCT-ND
S4: "DIP Switch, 2 Position, SPST SMD", Contact Current DC Max=25, Manufacturer="OMRON ELECTRONIC COMPONENTS", Manufacturer Part Number=A6SN-2101, Supplier Part Number 1=2029424, Contact Configuration=SPST, External Length / Height=7, No. of Switch Positions=2, PackageReference=DIP-4, Pitch Spacing=2.54, Storage Location="PCB Assembly WS", Supplier="ECE Dept", Supplier 1=Farnell
U1: library part SE_ATSAM4S16BA-MU, "IC MCU 32BIT 512KB FLASH 64LQFP", Manufacturer=Atmel, Package / Case=64-LQFP, Supplier Part Number 1=ATSAM4S8BA-ANRCT-ND, Voltage - Supply (Vcc/Vdd)="1.62 V ~ 3.6 V", Code_JEDEC=MO-220VMMD-3, ComponentLink1Description="Manufacturer URL", ComponentLink1URL=http://www.atmel.com/, ComponentLink2Description="SAM4S Series Datasheet", ComponentLink2URL=http://www.atmel.com/dyn/resources/prod_documents/11100.pdf, ComponentLink3Description="SAM4S Series Summary", ComponentLink3URL=http://www.atmel.com/dyn/resources/prod_documents/11100S.pdf, Connectivity="I²C, IrDA, Memory Card, SPI, SSC, UART/USART, USB", Core Processor="ARM® Cortex®-M4", Core Size=32-Bit, Data Converters="A/D 11x12b, D/A 2x12b", Manufacturer Part Number=ATSAM4S8BA-ANR, Number of I/O=47, PackageDescription="64-Pin Quad Flat No-Lead (QFN) Sawn, 9 x 9 x 1.0 mm Body, 0.5 mm Pitch, Exposed Pad", PackageReference=64PS, PackageVersion="revJ, Jul-2007", Packaging="Cut Tape (CT)", Peripherals="Brown-out Detect/Reset, DMA, POR, PWM, WDT", Program Memory Size="512KB (512K x 8)", Program Memory Type=FLASH, RAM Size="128K x 8", Speed=120MHz, Supplier 1=Digi-Key
U2: library part ADP2302ARDZ-5.0-R7, "IC REG BUCK 5V 2A 8SOIC", Current - Output=2A, Frequency - Switching=700kHz, Supplier Part Number 1=ADP2302ARDZ-5.0-R7CT-ND, Voltage - Input (Max)=20V, Voltage - Output (Min/Fixed)=5V, Manufacturer_Part_Number=ADP2302ARDZ-5.0-R7, Output Type=Fixed, Supplier 1=Digi-Key, Type=DEV, Vendor="Analog Devices Inc"
U3: library part NRF24, "nRF24 SMD Module", Warning="No power planes near or under device"
U4 U5: library part SV_CAT6219-330TDGT3, "IC REG LIN 3.3V 500MA TSOT23-5", Base Part Number=CAT6219, Current - Output=500mA, Package / Case="SOT-23-5 Thin, TSOT-23-5", Supplier Device Package=TSOT-23-5, Supplier Part Number=CAT6219-330TDGT3CT-ND, Voltage - Input (Max)=5.5V, Voltage - Output (Min/Fixed)=3.3V, Voltage Dropout (Max)="0.5V @ 500mA", ComponentLink1Description=http://www.onsemi.com/pub/Collateral/CAT6219-D.PDF, ComponentLink1URL=http://www.onsemi.com/pub/Collateral/CAT6219-D.PDF, Manufacturer Part Number=CAT6219-330TDGT3, Supplier=Digi-Key, Supplier 1=Digi-Key
U6: "Dual H-Bridge Motor Driver 1.5A"
U7: "1.8V - 5V level converter"
Y1: library part XT_CRYSTAL_12MHz_18pF, "CRYSTAL 12MHZ 18PF 6X3.5mm SMD", ESR (Equivalent Series Resistance)="60 Ohm", Frequency Stability=±50ppm, Frequency Tolerance=±30ppm, Load Capacitance=18pF, Manufacturer="CTS-Frequency Controls", Manufacturer Part Number=406C35D12M00000, Operating Mode=Fundamental, Operating Temperature="-20°C ~ 70°C", Package / Case="4-SMD, No Lead (DFN, LCC)", Supplier Part Number 1=CTX855CT-ND, Frequency=12MHz, Height="0.047\" (1.20mm)", Mounting Type="Surface Mount", Size / Dimension="0.236\" L x 0.138\" W (6.00mm x 3.50mm)", Supplier 1=Digi-Key

## Via types
v1: diameter 1, hole 0.5, Top Side to Bottom Side, 85 vias
v2: diameter 2.2, hole 1.6, Top Side to Bottom Side, 1 vias
v3: diameter 2, hole 1.5, Top Side to Bottom Side, 1 vias

## Nets (pads, with @x,y where several pads share a name; then routed paths per layer and width w, separated by ;. In a path a pad name is that pad's centre, name@x,y a point inside that pad or via, vN(x,y) a via of type N, cw(c..) or ccw(c..) an arc to the next point about the centre after c; other vN are vias at no path point)
3V3: C7.2 C9.2 C11.2 C14.2 C16.2 DL1.2 DL2.2 H2.7 H2.8 R18.2 S3.2 TP1.1 U1.1 U1.7 U1.18 U1.45 U1.58 U7.1 U7.5 | length 55.8
  Top Side w0.3: v1(9.8,54.2) 9.989,54.2 10.539,53.65 R18.2 ; U7.5 19.4,32.9 20.2,32.1 20.85,32.1 U7.1 21.65,31.3 24.6,31.3 v1(25,30.9) ; v1(22.9,65.2) 24.85,63.25 U1.18 26.5,63.225 27.575,63.225 28.166,62.634 28.166,61.934 v1(28.3,61.8) ; S3.2 24,44.7 v1(25.1,43.6) ; v1(32.4,62.2) 32.4,62.8 32.75,63.15 U1.7 ; v1(33,56.5) 33.264,56.5 34.25,55.514 U1.45 34.25,53.418 34.6,53.068 v1(34.6,51.3) ; v1(34.7,63.3) 34.7,63.44 35.75,64.49 U1.1 ; v1(35.7,60.4) 35.8,60.4 36.125,60.725 37.5,60.725 U1.58 39.35,60.75 v1(40.2,61.6) ; v1(42.3,47.5) DL2.2 ; DL1.2 46.95,51.1 47.25,50.8 v1(48.2,50.8) ; v1(60.4,24.4) 60.5,24.5 TP1.1
  Bottom Side w0.3: C7.2 27.556,62.4 28.156,61.8 v1(28.3,61.8) ; v1(32.4,62.2) 32.4,63.15 33.3,64.05 C14.2 ; v1(33,56.5) 33.411,56.5 34.3,55.611 C16.2 ; v1(34.7,63.3) 34.7,63.35 35.7,64.35 C9.2 ; v1(35.7,60.4) 36,60.4 36.2,60.6 C11.2
3V3_REG_IN: C19.2 C21.2 D2.2 D3.2 U4.1 U4.3 U5.1 U5.3 | length 53.9
  Top Side w0.3: v1(4.7,57.1) 4.7,57.289 5.042,57.632 U5.3 4.967,58.271 3.467,58.271 C21.2 3.192,58.196 2.468,58.196 2.292,58.371 2.292,60.096 2.492,60.296 4.992,60.296 U5.1 ; D3.2 15.9,50.775 U4.1 ; v1(16.2,55.5) 16.066,55.366 16.066,54.716 15.9,54.55 U4.3 15.1,54 14.9,53.8 14.9,52.3 15.1,52.1 U4.1 ; v1(16.2,71.6) 18.6,74 D2.2 ; C19.2 16.625,51.6 16.125,52.1 U4.1
  Bottom Side w0.3: v1(4.7,57.1) 6.3,55.5 v1(16.2,55.5) v1(16.2,71.6)
3V3_RF: 3V3_RF_TP.1 C22.2 R6.1 U5.5 | length 10.9
  Top Side w0.3: 3V3_RF_TP.1 7.6,62.6 7.9,62.3 7.9,60.396 U5.5@7.75,60.246 ; U5.5 U5.5@7.75,60.246 ; R6.1 11.35,60.4 C22.2 9.646,60.246 U5.5@7.75,60.246
5V: 5V_TP.1 C5.2 C6.2 D3.1 H7.3 H13.1 H13.2 L1.2 U2.5 U7.6 | length 28.1
  Top Side w0.3: v1(10.2,27) C5.2 C6.2 14.867,27.4 15.494,27.4 15.499,27.405 U2.5 18.6,29.316 ; H7.3 12.9,38.775 12.6,39.075 D3.1 17.925,40.525 5V_TP.1 ; U7.6 18.6,29.316 ; v1(20,29.5) 18.784,29.5 18.6,29.316
  Top Side w1: v1(7.2,26.9) 7.2,26.756 7.8,26.156 L1.2
AIN1: AIN1_TP.1 R10.2 U1.16 U6.16 | length 102.2
  Top Side w0.3: v1(22.5,13.7) 30.854,13.7 AIN1_TP.1 36.843,19.688 38.225,19.688 39.136,20.6 U6.16 ; R10.2 24.6,68.1 27.175,65.525 U1.16 28.25,66.125 25.7,68.675 v1(25.7,72.7)
  Bottom Side w0.3: v1(22.5,13.7) 22.5,30.169 22.1,30.569 22.1,65.531 25.7,69.131 v1(25.7,72.7)
AIN2: AIN2_TP.1 R11.2 U1.13 U6.15 | length 96.4
  Top Side w0.3: v1(25.8,17) 25.9,16.9 AIN2_TP.1 30.3,20.4 31.15,21.25 39.15,21.25 39.9,22 41.3,22 41.65,21.65 U6.15 ; R11.2 26.8,74.5 28.3,73 28.3,70.4 ; v1(27.2,72.6) 27.2,71.5 28.3,70.4 ; U1.13 29.75,68.95 28.3,70.4
  Bottom Side w0.3: v1(25.8,17) 23.5,19.3 23.5,22 26.8,25.3 26.8,38.75 26.95,38.9 26.95,50.65 22.9,54.7 22.9,61.4 27.2,65.7 v1(27.2,72.6)
BATT_DETECT: R14.1 R15.2 U1.52 | length 9.9
  Top Side w0.3: U1.52 40.419,57.75 40.669,57.5 45.35,57.5 R14.1 R15.2
BIN1: BIN1_TP.1 R12.2 U1.10 U6.9 | length 128.6
  Top Side w0.3: R12.2 29.1,75.15 29.1,74.5 31.25,72.35 31.25,70.15 ; v1(30.1,71.3) 31.25,70.15 ; U1.10 31.25,70.15 ; BIN1_TP.1 48.8,18.2 46.739,20.261 45.889,20.261 U6.9 v1(61.6,20.6)
  Bottom Side w0.3: v1(30.1,71.3) 30.1,75 32.2,77.1 62.324,77.1 62.5,76.924 62.5,21.5 v1(61.6,20.6)
BIN2: BIN2_TP.1 R13.2 U1.9 U6.10 | length 117.5
  Top Side w0.3: R13.2 31.75,74.6 31.75,72.186 ; U1.9 31.75,72.186 ; v1(32.8,75.2) 32.8,73.236 31.75,72.186 ; U6.10 44.9,21.25 45.3,21.65 45.3,26.3 BIN2_TP.1 44.15,28.7 46.05,30.6 v1(61.6,30.6)
  Bottom Side w0.3: v1(32.8,75.2) 34.25,76.65 61.1,76.65 61.6,76.15 v1(61.6,30.6)
BUMPER_ACTIVATE: H5.1 U1.42 | length 47.2
  Top Side w0.3: U1.42 32.75,53.081 32.4,52.731 32.4,51.41 33.8,50.01 v1(33.8,47.5)
  Bottom Side w0.3: v1(33.8,47.5) 37.9,47.5 40.009,49.609 40.009,58.441 40.719,59.15 45.625,59.15 H5.1
BUTTON: S2.1 U1.44 | length 27.6
  Top Side w0.3: U1.44 33.75,52.981 34,52.731 34,51.831 33.8,51.631 33.8,50.7 35.1,49.4 S2.1
Channel1: S4.1 U1.63 | length 27.4
  Top Side w0.3: U1.63 38.276,63.25 38.9,63.874 38.9,67.56 39.24,67.9 43.361,67.9 44,68.539 44,76.26 47.14,79.4 49.261,79.4 50.861,81 S4.1
Channel2: S4.2 U1.59 | length 28.7
  Top Side w0.3: U1.59 37.55,61.275 38.543,61.275 40.25,62.982 40.25,63.581 40.969,64.3 43.9,64.3 v1(44.6,63.6) ; v1(44.5,67) 44.5,75.7 47.26,78.46 S4.2
  Bottom Side w0.3: v1(44.5,67) 44.6,66.9 v1(44.6,63.6)
D_N: H3.2 R2.1 | length 4.4
  Top Side w0.381: R2.1@39.941,76.61 R2.1 ; H3.2 39.943,80.292 39.943,78.465 39.768,78.29 39.768,77.373 39.841,77.3 39.841,76.61 40.026,76.424 R2.1@40.126,76.424
D_P: H3.3 R1.1 | length 4.1
  Top Side w0.381: R1.1 38.9,76.45 39.06,76.61 39.06,77.3 39.133,77.373 39.133,78.553 39.308,78.728 39.308,80.292 H3.3
GND: C1.1 C2.1 C3.1 C5.1 C6.1 C7.1 C8.2 C9.1 C10.2 C11.1 C12.2 C13.1 C14.1 C15.2 C16.1 C17.1 C19.1 C20.1 C21.1 C22.1 C23.2 C25.2 D1.1 GND_TP_1.1 GND_TP_2.1 GND_TP_3.1 H1.1 H1.3 H2.5 H2.6 H3.5 H3.6 H5.2 H7.1 H13.9 H13.10 Q1.1 R8.1 R9.1 R10.1 R11.1 R12.1 R13.1 R15.1 S1.2 S2.2 S4.3 S4.4 U1.2 U1.17 U1.46 U1.60 U2.7 U2.EPAD U3.2 U4.2 U5.2 U6.3 U6.6 U6.13 U6.17 U7.2 | length 193.4
  Top Side w0.3: C21.1 3.492,59.296 U5.2 5.342,59.296 6.3,58.337 C13.1 6.3,54.78 H13.10 ; U3.2 3.9,66.8 3.9,65.274 5.524,63.65 10.25,63.65 14.6,59.3 ; v1(9.6,57.4) 9.6,58.8 C22.1 11.874,59 13.774,57.1 C20.1 14.6,59.3 ; C5.1 C6.1 15.002,24.865 U2.7 18.365,24.865 v3(19,25.5) ; U4.2 15.95,53 C19.1 ; v1(19.4,53.2) 19.266,53.066 18.466,53.066 18.4,53 C19.1 ; U7.2 22.9,32.9 v1(23,32.8) ; C3.1 23.4,21.888 24.588,20.7 v1(25.9,20.7) 27.35,20.7 S1.2 29.85,23.1 S2.2 ; R10.1 v1(24.6,78.8) ; U1.17 28.95,63.75 v1(29.1,63.6) ; R11.1 v1(26.8,78.8) ; v1(28.8,78.7) 28.9,78.6 R12.1 ; R13.1 v1(31,78.6) ; GND_TP_3.1 32.3,83 H3.6@35.8,83 ; v1(34.1,61.4) 34.289,61.4 34.639,61.75 U1.60 ; R9.1 34.6,77.3 34.6,78.125 36.775,80.3 36.8,80.3 H3.5 ; U1.46 34.75,55.961 35.1,56.311 v1(35.1,56.5) ; U1.2 35.25,66.56 35.566,66.876 35.566,67.566 v1(35.7,67.7) ; v1(38.1,13.9) 38.8,14.6 38.8,16.55 39.05,16.8 C25.2 41.15,16.8 U6.3@42.3,15.65 ; H3.6@38.3,83 40.3,83 H3.6@42.8,83 ; U6.3 U6.3@42.3,15.65 ; v1(42.5,69.5) 42.5,71.75 R8.1 ; U6.13 42.95,18.125 v2(43.275,17.8) ; U6.6 44.25,15.65 43.8,16.1 43.8,16.4 43.275,16.925 v2(43.275,17.8) ; GND_TP_1.1 49.1,5.7 v1(49.8,5) ; Q1.1 48.51,35.25 H1.1 ; R15.1 46.95,56.5 46.6,56.85 46.476,56.85 46.3,57.026 46.3,58.4 49.6,61.7 49.5,61.8 49.5,63.9 v1(48.8,64.6) 48.2,65.2 C1.1 ; C23.2 46.373,17.327 45.786,17.327 45.313,17.8 v2(43.275,17.8) ; GND_TP_2.1 56.3,24.6 v1(56.4,24.5) ; H5.2 59.8,75.864 S4.3 ; S4.4 v1(61.8,83) ; 14.6,59.3 17.1,56.8 17.7,56.8 C19.1 ; U6.3@42.3,15.65 42.3,16.825 v2(43.275,17.8)
  Top Side w1.016: D1.1 19.475,8.3 v1(24,8.3)
  Bottom Side w0.3: C7.1 26.8,63.6 v1(29.1,63.6) 29.1,64.95 30.25,66.1 C15.2 ; C12.2 26.9,58.9 v1(29.6,58.9) ; C8.2 33.5,67.7 v1(35.7,67.7) ; C14.1 34.766,67.566 35.566,67.566 v1(35.7,67.7) ; v1(33.5,59.4) 37.1,59.4 37.2,59.5 37.3,59.4 C10.2 ; v1(34.1,61.4) 34.2,61.5 35.775,61.5 36.275,62 ; v1(35.1,56.5) 35.6,56 35.6,55 C16.1 ; C9.1 v1(35.7,67.7) ; C11.1 36.275,62 ; C17.1 36.275,62
I2C_CLK: H13.3 U1.36 | length 38.5
  Top Side w0.3: v1(20.5,38.8) 22.801,41.101 23.733,41.101 28.3,45.669 v1(28.3,49.9) ; U1.36 29.75,53.44 30.1,53.09 30.1,51.4 v1(30.3,51.2)
  Bottom Side w0.3: H13.3 8.973,35.5 9.559,34.914 16.614,34.914 v1(20.5,38.8) ; v1(28.3,49.9) 29,49.9 v1(30.3,51.2)
I2C_DATA: H13.4 U1.43 | length 37.3
  Top Side w0.3: H13.4 6.841,38.04 11.471,42.67 16.896,42.67 17.276,43.05 19.05,43.05 19.6,43.6 19.6,44.574 23.576,48.55 25.297,48.55 26.732,49.985 26.732,50.432 v1(28.3,52) ; v1(33.2,52.4) 33.2,54.425 U1.43
  Bottom Side w0.3: v1(28.3,52) 28.4,52.1 32.711,52.1 33.011,52.4 v1(33.2,52.4)
LED_DIN: U1.3 U7.3 | length 59.3
  Top Side w0.3: U7.3 21.2,34.05 v1(21.2,37.4) ; v1(34,69.3) 34,67.31 34.75,66.56 U1.3
  Bottom Side w0.3: v1(21.2,37.4) 21.3,37.5 21.3,65.8 23,67.5 23,73.5 23.6,74.1 28.4,74.1 28.9,73.6 28.9,71.1 30.7,69.3 v1(34,69.3)
LED_STRIP: H7.2 U7.4 | length 5.8
  Top Side w0.3: H7.2 17.45,33.5 17.8,33.85 U7.4
MOTORL1: H4.1 U6.2 | length 22.8
  Top Side w0.3: U6.2 41.65,12.781 41.7,12.731 41.7,10.7 42.313,10.087 48.787,10.087 52.474,6.4 58.34,6.4 H4.1
MOTORL2: H4.2 U6.4 | length 20.3
  Top Side w0.3: U6.4 42.95,10.976 43.26,10.666 48.845,10.666 50.305,9.205 58.195,9.205 H4.2
MOTORR1: H6.1 U6.7 | length 16.2
  Top Side w0.3: U6.7 44.9,14.35 45.35,13.9 55,13.9 55.1,14 55.103,14 H6.1
MOTORR2: H6.2 U6.5 | length 16.8
  Top Side w0.3: U6.5 43.6,14.35 44.5,13.45 57.093,13.45 H6.2
NetC1_2: C1.2 U1.62 Y1.1 | length 19
  Top Side w0.3: U1.62 37.575,62.8 38.636,62.8 39.35,63.514 39.35,64.412 39.35,65.25 39.9,65.8 45.4,65.8 45.4,66.53 45.67,66.8 46.9,66.8 47.4,67.3 47.4,68.124 47.576,68.3 48.8,68.3 C1.2 49.6,67.45 50.223,66.827 50.223,66.633 Y1.1
NetC2_2: C2.2 U1.61 Y1.3 | length 14.4
  Top Side w0.3: U1.61 37.575,62.3 38.773,62.3 39.8,63.327 39.8,64.525 40.475,65.2 44.856,65.2 Y1.3 46.873,63.356 47.423,62.806 47.423,62.077 C2.2 ; C2.2@48.2,61.7 C2.2@48.2,61.75
NetC4_1: C4.1 U2.1 | length 2.4
  Top Side w0.3: C4.1 21.311,23.511 U2.1
NetC4_2: C4.2 D1.2 L1.1 U2.8 | length 36.2
  Top Side w0.3: L1.1@7.8,13.025 L1.1 ; C4.2@18.1,21.7 C4.2
  Top Side w1: L1.1 16.689,22.789 U2.8@16.689,23.511 ; D1.2 12.225,13.825 18.1,19.7 C4.2@18.1,21.7
  Top Side w1.524: L1.1@7.8,13.025 D1.2
NetC8_1: C8.1 C10.1 C12.1 C15.1 L2.2 U1.8 U1.12 U1.24 U1.54 | length 36.4
  Top Side w0.3: U1.24 26.5,60.225 28.075,60.225 v1(28.2,60.1) ; U1.12 30.275,65.5 30.275,64.125 v1(31,63.4) 31.4,63.4 32.25,64.25 U1.8 32.25,70.35 L2.2 ; v1(35.7,58.4) 36.2,58.4 36.525,58.725 37.5,58.725 U1.54
  Bottom Side w0.3: C12.1 26.85,60.15 28.15,60.15 v1(28.2,60.1) ; C15.1 31,64 v1(31,63.4) ; C8.1 31.9,63.9 31.4,63.4 v1(31,63.4) ; C10.1 36.1,58 v1(35.7,58.4) 32.95,58.4 31.25,60.1 v1(28.2,60.1) ; v1(28.2,60.1) 28.872,60.772 28.872,61.24 31,63.369 v1(31,63.4)
NetC13_2: C13.2 R6.2 U3.1 | length 20.7
  Top Side w0.3: U3.1 2.329,64.803 1.25,63.724 1.25,61.476 1.838,60.887 5.65,60.887 5.867,60.67 5.867,59.533 6.75,58.65 6.75,57.7 7.55,56.9 8.35,56.9 9.05,56.2 11,56.2 11.7,56.9 R6.2
NetC17_2: C17.2 C18.2 L2.1 U1.64 | length 13.4
  Top Side w0.3: C18.2 37.3,72.6 L2.1 37.3,69.4 37.6,69.1 v1(37.6,66) 37.6,63.825 U1.64
  Bottom Side w0.3: C17.2 37.525,65.925 v1(37.6,66)
NetC18_1: C18.1 R9.2 | length 2.2
  Top Side w0.3: C18.1 36.9,74.8 R9.2
NetC20_2: C20.2 R18.1 U4.5 | length 5.8
  Top Side w0.3: R18.1 11.65,52.1 U4.5 13.2,52.65 14.025,53.475 14.025,54.424 14.023,54.426 14.023,55.123 C20.2
NetC23_1: C23.1 C24.1 R16.1 R17.1 U6.12 | length 11.9
  Top Side w0.3: R17.1 41,25.6 R16.1 41.2,22.7 42.5,22.7 42.9,22.3 42.9,21.95 43.6,21.25 U6.12 43.6,19.95 44.112,19.438 45.862,19.438 C23.1
NetC24_2: C24.2 U6.11 | length 2.2
  Top Side w0.3: C24.2@44.1,22.7 44.1,21.8 44.25,21.65 U6.11
NetC25_1: C25.1 U6.14 | length 5
  Top Side w0.3: C25.1 41.2,18.2 41.725,18.725 41.725,19.075 41.957,19.306 42.068,19.306 42.3,19.538 U6.14
NetDL1_1: DL1.1 R4.1 | length 1.9
  Top Side w0.3: R4.1 44.5,49.5 DL1.1
NetDL2_1: DL2.1 R5.1 | length 2.5
  Top Side w0.3: R5.1 40.8,49.6 DL2.1
NetF1_1: F1.1 H1.2 | length 9.1
  Top Side w0.3: H1.2 52.5,32.334 52.884,31.95 F1.1
NetF1_2: F1.2 Q1.3 | length 16.3
  Top Side w0.3: Q1.3 54.501,36.2 55.851,34.85 F1.2
NetR1_2: R1.2 U1.57 | length 19.1
  Top Side w0.3: U1.57 40.35,60.25 41.2,61.1 v1(41.2,63.4) ; v1(38.5,69.5) 38.5,74.05 38.8,74.35 R1.2
  Bottom Side w0.3: v1(38.5,69.5) 39.75,68.25 39.75,65.039 41.2,63.589 v1(41.2,63.4)
NetR2_2: R2.2 U1.56 | length 20.7
  Top Side w0.3: U1.56 40.486,59.75 41.701,60.965 41.701,62.201 v1(43,63.5) ; v1(39.8,72.8) 39.8,73.45 40.1,73.75 R2.2
  Bottom Side w0.3: v1(39.8,72.8) 41.2,71.4 41.2,65.3 v1(43,63.5)
NetR3_1: R3.1 U2.4 | length 3.9
  Top Side w0.3: U2.4 21.82,27.405 21.924,27.509 21.924,28.224 22.4,28.7 23.1,28.7 23.4,28.4 R3.1
NetTP2_1: TP2.1 U1.55 | length 6.8
  Top Side w0.3: U1.55 43.55,59.25 TP2.1
nFAULT: U1.32 U6.8 | length 58.2
  Top Side w0.3: v1(24.8,55.1) 25.638,55.938 26.163,55.938 U1.32 ; U6.8 v1(47.2,15)
  Bottom Side w0.3: v1(24.8,55.1) 24.8,53.436 27.4,50.836 27.4,41.331 33.1,35.631 33.1,33.847 32.736,33.484 32.736,21.4 39.136,15 v1(47.2,15)
nRST: H2.1 nRST_TP.1 S1.1 U1.39 | length 63
  Top Side w0.3: v1(28.2,43.7) 28.2,43.556 27.6,42.956 27.6,37 27.5,36.9 nRST_TP.1 27.5,29.95 S1.1 ; v1(31.2,49.7) 31.5,50 31.5,53.2 31.25,53.45 U1.39 31.25,56.55 32.3,57.6 35.6,57.6 36.4,56.8 36.4,56.124 36.699,55.825 38.411,55.825 38.736,55.5 44.2,55.5 44.833,54.867 45.523,54.867 46.19,54.2 v1(46.2,54.2)
  Bottom Side w0.3: v1(28.2,43.7) 30.2,45.7 30.2,48.7 v1(31.2,49.7) ; v1(46.2,54.2) 46.326,54.326 46.574,54.326 46.8,54.1 51.6,54.1 53.101,52.599 58.015,52.599 H2.1
nSLEEP: U1.41 U6.1 | length 47.7
  Top Side w0.3: v1(32.2,35.4) 32.2,50.031 31.95,50.281 31.95,52.918 32.25,53.218 U1.41 ; v1(40.7,12.8) 40.8,12.9 40.8,13.75 41,13.95 U6.1
  Bottom Side w0.3: v1(32.2,35.4) 32.2,21.3 v1(40.7,12.8)
Proximity_Signal: H13.7 U1.23 | length 33.6
  Top Side w0.3: v1(20.5,60.1) 20.543,60.1 21.193,60.75 U1.23
  Bottom Side w0.3: H13.7 7.2,48.06 7.2,50.124 7.376,50.3 18.3,50.3 20.5,52.5 v1(20.5,60.1)
RADIO_CSN: U1.28 U3.4 | length 24.9
  Top Side w0.3: U3.4 6.143,65.557 7.6,64.1 10.436,64.1 16.236,58.3 26.425,58.3 U1.28
RADIO_ENABLE: U1.15 U3.3 | length 42.1
  Top Side w0.3: v1(1.2,65.2) 1.2,68.374 1.476,68.65 4.55,68.65 4.871,68.329 U3.3 ; v1(14.6,69.1) 22.4,69.1 27.05,64.45 28.426,64.45 28.75,64.774 U1.15
  Bottom Side w0.3: v1(1.2,65.2) 1.2,68.3 1.9,69 14.5,69 v1(14.6,69.1)
RADIO_IRQ: U1.20 U3.8 | length 19.5
  Top Side w0.3: U3.8 12.6,67.1 17.1,62.6 v1(17.2,62.6) ; v1(18.9,64.7) 22.269,64.7 24.644,62.325 26.568,62.325 U1.20@26.718,62.175
  Bottom Side w0.3: v1(17.2,62.6) 18.228,63.628 18.228,64.028 v1(18.9,64.7)
RADIO_MISO: U1.27 U3.7 | length 20.9
  Top Side w0.3: U3.7 10.257,66.8 10.257,65.143 16.65,58.75 U1.27
RADIO_MOSI: U1.22 U3.6 | length 21.3
  Top Side w0.3: U3.6 8.686,65.6 9.1,65.186 v1(9.1,64.9) ; v1(15,62.4) 16.15,61.25 U1.22
  Bottom Side w0.3: v1(9.1,64.9) 12.5,64.9 v1(15,62.4)
RADIO_SCK: U1.21 U3.5 | length 23.8
  Top Side w0.3: U3.5 7.414,68.6 7.864,69.05 12.3,69.05 18.55,62.8 23.5,62.8 24.475,61.825 26.4,61.825 U1.21
Servo1: H13.5 U1.38 | length 40.1
  Top Side w0.3: H13.5 3.675,41.705 3.675,44.075 3.9,44.3 6.1,44.3 6.3,44.1 17.853,44.1 23.203,49.45 24.924,49.45 25.832,50.357 25.832,53.944 28.438,56.55 29.986,56.55 30.75,55.786 U1.38
Servo2: H13.6 U1.37 | length 34.3
  Top Side w0.3: H13.6 11.656,43.12 12.036,43.5 17.889,43.5 23.389,49 25.111,49 26.282,50.171 26.282,53.182 27.6,54.5 27.6,55.076 28.624,56.1 29.8,56.1 30.25,55.65 U1.37
STATUS0: R4.2 U1.48 | length 10.2
  Top Side w0.3: U1.48 35.75,54.186 36.236,53.7 41.8,53.7 R4.2
STATUS1: R5.2 U1.47 | length 7
  Top Side w0.3: U1.47 35.25,53.724 35.724,53.25 38.25,53.25 R5.2
SWCLK: H2.2 U1.53 | length 24.4
  Top Side w0.3: U1.53 40.95,58.25 v1(41,58.3)
  Bottom Side w0.3: v1(41,58.3) 47.7,58.3 48.6,57.4 57.1,57.4 57.725,56.775 57.725,54.849 H2.2
SWDIO: H2.4 U1.51 | length 19.5
  Top Side w0.3: U1.51 37.575,57.3 40.1,57.3 40.35,57.05 41.707,57.05 42.357,56.4 v1(42.4,56.4)
  Bottom Side w0.3: v1(42.4,56.4) 42.468,56.332 56.532,56.332 H2.4
USB_DETECT: R7.1 R8.2 U1.35 USB_DETECT_TP.1 | length 60.8
  Top Side w0.3: U1.35 29.25,52.047 29.3,51.997 29.3,50.169 29.25,50.119 29.25,50 ; v1(31.1,47.9) 31.1,48.15 29.25,50 ; USB_DETECT_TP.1 31.4,34.5 29.25,36.65 29.25,50 ; v1(40.2,69.5) 40.2,72.069 41.681,73.55 R8.2 42.6,74.6 43,75 R7.1
  Bottom Side w0.3: v1(31.1,47.9) 32.331,47.9 38.4,53.969 38.4,57.468 41.9,60.968 41.9,62.969 42,63.069 42,63.731 40.2,65.531 v1(40.2,69.5)
V_BAT: C3.2 Q1.2 R3.2 R14.2 R16.2 R17.2 U2.2 U2.3 V_BATT_TP.1 | length 78.8
  Top Side w0.3: U2.2 23.365,24.865 C3.2 C3.2@23.4,25.1 ; U2.3 23.385,26.135 R3.2 C3.2@23.4,25.1 ; R16.2 39.4,23 R17.2 ; R14.2 48,56.55 48,53.1 56,45.1 59.1,45.1 V_BATT_TP.1 52.75,37.15 Q1.2 41.35,37.15 39.4,35.2 R17.2 ; C3.2@23.4,25.1 24,25.7 R17.2
VBUS: D2.1 H3.1 R7.2 VBUS_TP.1 | length 36.4
  Top Side w0.3: D2.1 28.425,80.975 29.6,79.8 34.1,79.8 35.8,81.5 40.524,81.5 40.599,81.425 40.599,80.301 40.6,79.825 41.325,79.1 ; R7.2 42.3,77.45 42.3,78.125 41.325,79.1 ; VBUS_TP.1 44.7,79.1 41.325,79.1
WKNP: S3.1 U1.31 | length 7.5
  Top Side w0.3: S3.1 23.9,51.1 23.9,55.331 25.294,56.725 26.45,56.725 U1.31
pads on no net: H2.3 H2.9 H2.10 H3.4 H13.8 U1.4 U1.5 U1.6 U1.11 U1.14 U1.19 U1.25 U1.26 U1.29 U1.30 U1.33 U1.34 U1.40 U1.49 U1.50 U2.6 U4.4 U5.4 Y1.2 Y1.4

## Polygon pours and split planes (outlines as drawn)
5V on Power Plane (split plane): 24.071,42.446 24.071,15.9 24.08,15.85 24.108,15.808 24.287,15.629 0.51,15.629 0.51,44.427 0.554,44.471 22.046,44.471
3V3 on Power Plane (split plane): 63.49,0.51 0.51,0.51 0.51,15.371 24.6,15.371 24.65,15.38 24.692,15.408 24.72,15.45 24.729,15.5 24.72,15.55 24.692,15.592 24.329,15.954 24.329,42.5 24.32,42.55 24.292,42.592 22.192,44.692 22.15,44.72 22.1,44.729 0.51,44.729 0.51,84.49 0.818,84.49 0.729,84.4 0.603,70.1 15.4,70.1 15.4,84.49 63.49,84.49
GND on Ground Plane (split plane): 63.49,0.51 0.51,0.51 0.51,84.49 0.792,70.1 15.4,70.1 15.4,84.4 0.6,84.4 0.51,84.49 63.49,84.49

## Other copper
Top Side:
  pour cut-out: 0.729,84.4 15.2,84.4 15.5,84.1 15.5,70.1 0.701,70.1
Bottom Side:
  pour cut-out: 0.729,84.4 15.4,84.4 15.4,69.6 0.7,69.6 0.6,69.7
Ground Plane (plane layer: these items are gaps in the copper):
  region: 13.7,78.9
  pour cut-out: 0.51,84.49 0.6,84.4 15.4,84.4 15.4,70.1 0.792,70.1
Power Plane (plane layer: these items are gaps in the copper):
  pour cut-out: 0.729,84.4 0.829,84.5 15.4,84.5 15.4,70.1 0.603,70.1
  lines w0.254: 0.4,15.5 24.6,15.5 24.2,15.9 24.2,42.5 22.1,44.6 0.5,44.6 0.4,44.5

## Silkscreen, mask and mechanical layers (free items; w line width, h text height)
Top Overlay:
  text "Group31 Bill Liu, Diardu Terblanche" at 19.8,2.3 h0.8
Board Outline:
  the board outline again, w0.254

## Dimensions
0,86 to 64,86 on Mechanical 1
65,85 to 65,0 on Mechanical 1

## Text inside footprints (layer, text, board x,y; h text height)
H2: Top Overlay "9" at 59.89,65.084 h0.8 r90; Top Overlay "10" at 57.35,65.084 h0.8 r90; Top Overlay "1" at 59.89,52.025 h0.8 r90; Top Overlay "2" at 57.35,51.525 h0.8 r90
H3: Mechanical 1 "PCB Edge" at 41.45,85.27 h0.8 r180
H4: Top Overlay "1" at 62.527,6.874 h0.8 r180
H5: Top Overlay "1" at 62.227,72.039 h0.8 r180
H6: Top Overlay "1" at 54.573,17.182 h0.8
H7: Top Overlay "1" at 17.345,31.595 h0.8 r180
H13: Top Overlay "1" at 9.1,31 h1.52 r180
S4: Top Overlay "ON" at 59.2,77.5 h0.8 r270; Top Overlay "1" at 50.4,82.65 h0.8 r270; Top Overlay "2" at 50.35,77.1 h0.8 r270
U2: Mechanical 13 "*" at 20.93,24.344 h0.8 r180
U3: Top Overlay "NO GND/ / POWER / PLANES / UNDER / OR NEARBY" at 2.429,72.375 h0.8